# Altium PCB PCB3.PcbDoc
Units mil, origin at the board's own origin, x right, y up, seen from the top; angles counter-clockwise.
Board outline 6000 x 4000 mil, 2 copper layers (Top Layer, Bottom Layer); 67 components, 69 nets, 288 pads, 0 vias.
Unrouted connection lines stored in the file: 159.
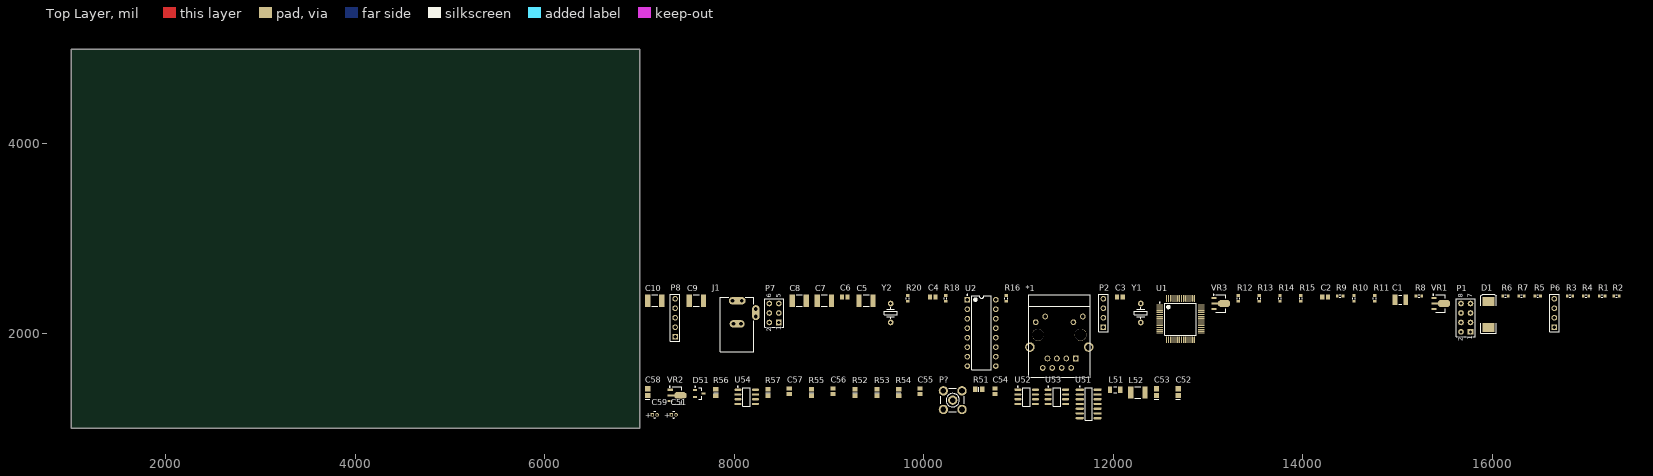
[diagram p0: Top Layer view]
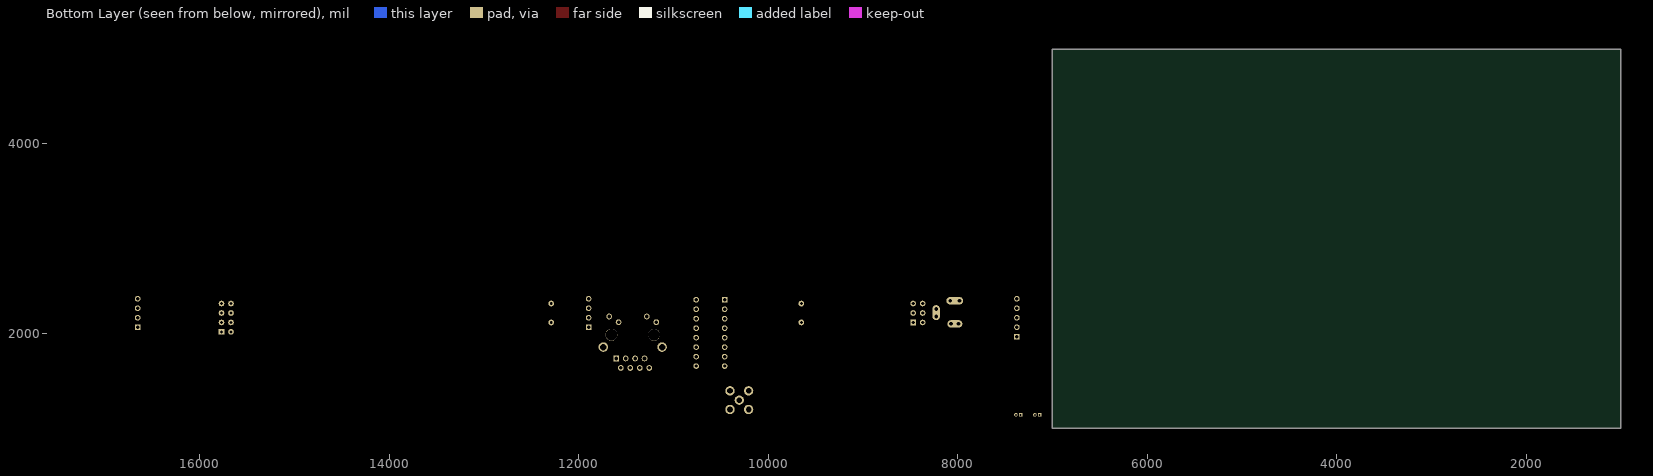
[diagram p1: Bottom Layer view, seen from below]

## Layer stack, top to bottom
Top Layer: signal copper 1.4
Dielectric: dielectric 12.6, FR-4, Dk 4.8
Bottom Layer: signal copper 1.4

## Board outline
1000,1000 7000,1000 7000,5000 1000,5000

## Design rules (kind name [scope] priority, off if disabled: settings)
Clearance [All] p1: gap=10
PolygonConnect [All] p1: connectstyle=Relief reliefconductorwidth=10 reliefentries=4 polygonreliefangle="90 Angle"
RoomDefinition Sheet1 [InComponentClass('Sheet1')] p1: confinementstyle=ConfineIn formatcopy=TRUE lockcomponents=FALSE outline 7045,1525 17390,1525 17390,2525 7045,2525
RoomDefinition Amp [InComponentClass('Amp')] p2: confinementstyle=ConfineIn formatcopy=TRUE lockcomponents=FALSE outline 7045,1060 12795,1060 12795,1525 7045,1525
RoutingVias [All] p1: holewidth=28 width=50 viastyle="Through Hole" minholewidth=28 minwidth=50 maxholewidth=28 maxwidth=50
SilkscreenOverComponentPads [All] p1: minsilkscreentomaskgap=10
SolderMaskExpansion [All] p1: expansion=4
Width [All] p1: maxlimit=10 minlimit=10 preferedwidth=10
27 further rules are at their usual default settings.

## Classes and differential pairs
component class Sheet1: *1 C1 C2 C3 C4 C5 C6 C7 C8 C9 C10 D1 J1 P1 P2 P6 P7 P8 R1 R2 R3 R4 R5 R6 R7 R8 R9 R10 R11 R12 R13 R14 R15 R16 R18 R20 U1 U2 VR1 VR3 Y1 Y2
component class Amp: C51 C52 C53 C54 C55 C56 C57 C58 C59 D51 L51 L52 P? R51 R52 R53 R54 R55 R56 R57 U51 U52 U53 U54 VR2

## Components (designator, comment, footprint, x,y, rotation, side; value= is the part's Value field where it differs from the comment)
*1 "Component_1" EthernetCON 11430,1985 r90 top
C1 "Cap" CAPC3225N 15030,2355 r0 top
C2 "Cap" CAPC2012L 14235,2385 r0 top
C3 "Cap" CAPC2012L 12070,2385 r0 top
C4 "Cap" CAPC2012L 10095,2385 r0 top
C5 "Cap" CAPC4532L 9390,2345 r0 top
C6 "Cap" CAPC2012L 9165,2385 r0 top
C7 "Cap" CAPC4532L 8950,2345 r0 top
C8 "Cap" CAPC4532L 8685,2345 r0 top
C9 "Cap" CAPC4532L 7600,2345 r0 top
C10 "Cap" CAPC4532L 7160,2345 r0 top
C51 "Cap Pol1" CAPPR1.27-1.7x2.8 7360,1140 r0 top
C52 "Cap" CAPC2512L 12685,1380 r90 top
C53 "Cap" CAPC2512L 12455,1380 r90 top
C54 "Cap" CAPC2012L 10750,1390 r90 top
C55 "Cap" CAPC2012L 9960,1390 r90 top
C56 "Cap" CAPC2012L 9040,1390 r90 top
C57 "Cap" CAPC2012L 8580,1390 r90 top
C58 "Cap" CAPC2512L 7085,1380 r90 top
C59 "Cap Pol1" CAPPR1.27-1.7x2.8 7160,1140 r0 top
D1 "Diode" DSO-C2/X3.3 15960,2200 r90 top
D51 "Diode BAT17" SOT95P240-3N 7630,1365 r0 top
J1 "PWR2.5" KLD-0202 8030,1805 r90 top
L51 "Inductor" INDC3216AL 12020,1405 r0 top
L52 "Inductor" INDC4532L 12260,1375 r0 top
P1 "Header 4X2" HDR2X4 15770,2015 r90 top
P2 "Header 4" HDR1X4 11895,2065 r90 top
P6 "Header 4" HDR1X4 16655,2065 r90 top
P7 "Header 3X2" HDR2X3 8470,2115 r90 top
P8 "Header 5" HDR1X5 7375,1965 r90 top
P? "SMB" SMB_V-RJ45 10305,1295 r0 top
R1 "Res3" RESC1608L 17160,2395 r0 top
R2 "Res3" RESC1608L 17310,2395 r0 top
R3 "Res3" RESC1608L 16820,2395 r0 top
R4 "Res3" RESC1608L 16990,2395 r0 top
R5 "Res3" RESC1608L 16480,2395 r0 top
R6 "Res3" RESC1608L 16140,2395 r0 top
R7 "Res3" RESC1608L 16310,2395 r0 top
R8 "Res3" RESC1608L 15225,2395 r0 top
R9 "Res3" RESC1608L 14395,2395 r0 top
R10 "Res3" RESC1608L 14540,2370 r90 top
R11 "Res3" RESC1608L 14760,2370 r90 top
R12 "Res3" RESC1608L 13320,2370 r90 top
R13 "Res3" RESC1608L 13540,2370 r90 top
R14 "Res3" RESC1608L 13760,2370 r90 top
R15 "Res3" RESC1608L 13980,2370 r90 top
R16 "Res3" RESC1608L 10870,2370 r90 top
R18 "Res3" RESC1608L 10230,2370 r90 top
R20 "Res3" RESC1608L 9830,2370 r90 top
R51 "Res2" RESC2012N 10580,1410 r0 top
R52 "Res2" RESC2012N 9275,1375 r90 top
R53 "Res2" RESC2012N 9505,1375 r90 top
R54 "Res2" RESC2012N 9735,1375 r90 top
R55 "Res2" RESC2012N 8815,1375 r90 top
R56 "Res2" RESC2012N 7805,1375 r90 top
R57 "Res2" RESC2012N 8355,1375 r90 top
U1 "PIC18F67J60-I/PT" TQFP-PT64_N 12710,2150 r0 top
U2 "SN754410NE" NE016 10610,2005 r0 top
U51 "SN74S197D" D014_N 11740,1255 r0 top
U52 "SA5205A" SOIC127P600-8L 11085,1330 r0 top
U53 "AD8561" SOIC127P600-8L 11405,1330 r0 top
U54 "AD8400" SOIC127P600-8L 8130,1330 r0 top
VR1 "Volt Reg" SOT89N 15455,2315 r0 top
VR2 "Volt Reg" SOT89N 7395,1345 r0 top
VR3 "Volt Reg" SOT89N 13135,2315 r0 top
Y1 "XTAL" Quartz 12290,2115 r90 top
Y2 "Z" Quartz 9650,2115 r90 top

## Footprints (in the part's own frame and the unit in brackets; to place one, negate y for a bottom-side part, rotate by r counter-clockwise, add the part's x,y. Pads: shape width x height; smd on the part's side, far side on the other; paste and mask are expansions set on the pad)
CAPC2012L [mm] "Chip Capacitor, Body 2.0x1.3mm, IPC High Density"
  rect 1.1x1.4 smd: 1(-0.75,0) 2(0.75,0)
  body extent -1.1,-0.72 1.1,0.72, height 1.4
CAPC2512L [mm] "Chip Capacitor, Body 2.54x1.27mm, IPC High Density"
  rect 1.4x1.4 smd: 1(-0.9,0) 2(0.9,0)
  silkscreen extent -1.9,-0.6 -1.9,0.6, body extent -1.45,-0.82 1.45,0.82, height 1.3
CAPC3225N [mm] "Chip Capacitor, Body 3.2x2.5mm, IPC Medium Density"
  rect 1.3x2.7 smd: 1(-1.45,0) 2(1.45,0)
  silkscreen extent -0.4,-1.25 0.4,1.25, body extent -1.7,-1.35 1.7,1.35, height 1.5
CAPC4532L [mm] "Chip Capacitor, Body 4.5x3.2mm, IPC High Density"
  rect 1.4x3.3 smd: 1(-1.9,0) 2(1.9,0)
  silkscreen extent -0.8,-1.55 0.8,1.55, body extent -2.4,-1.7 2.4,1.7, height 1.4
CAPPR1.27-1.7x2.8 [mm] "Capacitor, Radial, Tantalum; Body 1.7 x 2.8 mm (Dia.xH max); Pin Spacing 1.27 mm (typ)"
  rect 0.95x0.95 hole 0.55: 1(-0.635,0)
  round 0.95 hole 0.55: 2(0.635,0)
  silkscreen extent -0.29,-0.85 0.29,0.85
D014_N [mm] "SOIC, 14-Leads, Body 8.7x3.9mm, Pitch 1.27mm, IPC Medium Density"
  oval 2.2x0.6 smd: 1(-2.4,3.81) 2(-2.4,2.54) 3(-2.4,1.27) 4(-2.4,0) 5(-2.4,-1.27) 6(-2.4,-2.54) 7(-2.4,-3.81) 8(2.4,-3.81) 9(2.4,-2.54) 10(2.4,-1.27) 11(2.4,0) 12(2.4,1.27) 13(2.4,2.54) 14(2.4,3.81)
  silkscreen extent -2.52,-4.4 0.9,4.78, body extent -2,-4.38 2,4.38, height 1.75
DSO-C2/X3.3 [mm] "DO-214-AB/SMC; 2 C-Bend Leads; Body 7.9 x 5.9 mm, inc. leads (LxW)"
  rect 2.4x3.3 smd: 1(-3.475,0) 2(3.475,0)
  silkscreen extent -5.07,-2.05 5.43,2.05
EthernetCON [mil] "Ethernet connector w/two LEDs"
  rect 60x60 hole 38: 1(-250,-175)
  round 60 hole 38: 2(-350,-125) 3(-250,-75) 4(-350,-25) 5(-250,25) 6(-350,75) 7(-250,125) 8(-350,175) 9(193,-249) 10(133,-149) 11(193,149) 12(133,249)
  round 100 hole 70: 13(-130,-310) 14(-130,310)
  round 125 hole 125 unplated: 15(0,-225) 16(0,225)
  silkscreen extent -450,-325 425,325, body extent -450,-325 425,325, height 550
HDR1X4 [mm] "Connector; Header; 4 Position"
  rect 1.5x1.5 hole 0.9: 1(0,0)
  round 1.5 hole 0.9: 2(2.54,0) 3(5.08,0) 4(7.62,0)
  silkscreen extent -1.27,-1.27 8.89,1.27
HDR1X5 [mm] "Connector; Header; 5 Position"
  rect 1.5x1.5 hole 0.9: 1(0,0)
  round 1.5 hole 0.9: 2(2.54,0) 3(5.08,0) 4(7.62,0) 5(10.16,0)
  silkscreen extent -1.27,-1.27 11.43,1.27
HDR2X3 [mm] "Connector; Header; 3x2 Position"
  rect 1.5x1.5 hole 0.9: 1(0,0)
  round 1.5 hole 0.9: 2(0,2.54) 3(2.54,0) 4(2.54,2.54) 5(5.08,0) 6(5.08,2.54)
  silkscreen extent -1.27,-1.27 6.35,3.81
HDR2X4 [mm] "Connector; Header; 4x2 Position"
  rect 1.5x1.5 hole 0.9: 1(0,0)
  round 1.5 hole 0.9: 2(0,2.54) 3(2.54,0) 4(2.54,2.54) 5(5.08,0) 6(5.08,2.54) 7(7.62,0) 8(7.62,2.54)
  silkscreen extent -1.27,-1.27 8.89,3.81
INDC3216AL [mm] "Chip Inductor, Body 3.2x1.6mm, IPC High Density"
  rect 1.1x1.8 smd: 1(-1.35,0) 2(1.35,0)
  silkscreen extent -0.4,-0.8 0.4,0.8, body extent -1.7,-0.9 1.7,0.9, height 0.55
INDC4532L [mm] "Chip Inductor, Body 4.5x3.2mm, IPC High Density"
  rect 1.4x3.3 smd: 1(-1.9,0) 2(1.9,0)
  silkscreen extent -0.8,-1.55 0.8,1.55, body extent -2.4,-1.7 2.4,1.7, height 0.55
KLD-0202 [mm] "DC Power Jack, 2.5mm, KLD Series, PCB Mount"
  oval 2x4.5 all layers, no hole: 1(13.7,0)
  round 1.5 hole 1: 1A(13.7,-1.25) 1B(13.7,1.25) 2A(7.5,-1) 2B(7.5,1) 3A(9.5,-5) 3B(11.5,-5)
  oval 2x4 all layers, no hole: 2(7.5,0)
  oval 4x2 all layers, no hole: 3(10.5,-5)
  silkscreen extent 0,-4.5 14.6,4.5
NE016 [mm] "DIP, 16-Leads, Row Spacing 7.62mm, Pitch 2.54mm, Body 19.4x6.35mm"
  rect 1.5x1.5 hole 0.9: 1(-3.81,8.89)
  round 1.5 hole 0.9: 2(-3.81,6.35) 3(-3.81,3.81) 4(-3.81,1.27) 5(-3.81,-1.27) 6(-3.81,-3.81) 7(-3.81,-6.35) 8(-3.81,-8.89) 9(3.81,-8.89) 10(3.81,-6.35) 11(3.81,-3.81) 12(3.81,-1.27) 13(3.81,1.27) 14(3.81,3.81) 15(3.81,6.35) 16(3.81,8.89)
  silkscreen extent -3.93,-9.9 2.65,10.31, body extent -3.3,-9.9 3.3,9.9, height 5.08
Quartz [mil]
  round 60 hole 30: 1(0,0) 2(200,0)
  silkscreen extent 40,-70 160,70, body extent -100,-100 300,100, height 90
RESC1608L [mm] "Chip Resistor, Body 1.6x0.8mm, IPC High Density"
  rect 0.7x0.9 smd: 1(-0.75,0) 2(0.75,0)
  silkscreen extent -0.2,-0.35 0.2,0.35, body extent -0.85,-0.48 0.85,0.48, height 0.9
RESC2012N [mm] "Chip Resistor, Body 2.0x1.2mm, IPC Medium Density"
  rect 1.2x1.4 smd: 1(-0.9,0) 2(0.9,0)
  silkscreen extent 0,-0.6 0,0.6, body extent -1.07,-0.7 1.07,0.7, height 0.7
SMB_V-RJ45 [mm] "Connector; SMB Straight"
  round 2.5 hole 1.5: 1(0,0) 2(-2.5,-2.5) 2(-2.5,2.5) 2(2.5,-2.5) 2(2.5,2.5)
  silkscreen extent -3.15,-3.15 3.15,3.15
SOIC127P600-8L [mm] "SOIC, 8-Leads, Body 4.9x3.9mm, Pitch 1.27mm, IPC High Density"
  oval 1.9x0.6 smd: 1(-2.35,1.905) 2(-2.35,0.635) 3(-2.35,-0.635) 4(-2.35,-1.905) 5(2.35,-1.905) 6(2.35,-0.635) 7(2.35,0.635) 8(2.35,1.905)
  silkscreen extent -2.47,-2.5 1,2.88, body extent -2,-2.5 2,2.5, height 1.75
SOT89N [mm] "SOT89, 3-Leads, Body 4.5x2.4 mm, Pitch 1.5mm, Lead Span 4.1mm, IPC Medium Density"
  rect 1.4x0.6 smd: 1(-1.8,1.5) 3(-1.8,-1.5)
  rect 1.8x0.6 smd: 2(-1.6,0)
  oct 3.2x1.9 smd: 2(0.9,0)
  silkscreen extent -2.07,-2.3 1.3,2.47, body extent -1.3,-2.3 1.3,2.3, height 1.6
SOT95P240-3N [mm] "SOT23, 3-Leads, Body 2.9x1.3mm, Pitch 0.95mm, Lead Span 2.4mm, IPC Medium Density"
  rect 1.15x0.6 smd: 1(-1.125,0.95) 2(-1.125,-0.95) 3(1.125,0)
  silkscreen extent -1.25,-1.5 0.7,1.92, body extent -0.7,-1.5 0.7,1.5, height 1.14
TQFP-PT64_N [mm] "Thin QFP, 64-Leads, Body 10x10mm, Pitch 0.5mm, IPC Medium Density"
  oval 1.8x0.3 smd: 1(-5.55,3.75) 2(-5.55,3.25) 3(-5.55,2.75) 4(-5.55,2.25) 5(-5.55,1.75) 6(-5.55,1.25) 7(-5.55,0.75) 8(-5.55,0.25) 9(-5.55,-0.25) 10(-5.55,-0.75) 11(-5.55,-1.25) 12(-5.55,-1.75) 13(-5.55,-2.25) 14(-5.55,-2.75) 15(-5.55,-3.25) 16(-5.55,-3.75) 33(5.55,-3.75) 34(5.55,-3.25) 35(5.55,-2.75) 36(5.55,-2.25) 37(5.55,-1.75) 38(5.55,-1.25) 39(5.55,-0.75) 40(5.55,-0.25) 41(5.55,0.25) 42(5.55,0.75) 43(5.55,1.25) 44(5.55,1.75) 45(5.55,2.25) 46(5.55,2.75) 47(5.55,3.25) 48(5.55,3.75)
  oval 0.3x1.8 smd: 17(-3.75,-5.55) 18(-3.25,-5.55) 19(-2.75,-5.55) 20(-2.25,-5.55) 21(-1.75,-5.55) 22(-1.25,-5.55) 23(-0.75,-5.55) 24(-0.25,-5.55) 25(0.25,-5.55) 26(0.75,-5.55) 27(1.25,-5.55) 28(1.75,-5.55) 29(2.25,-5.55) 30(2.75,-5.55) 31(3.25,-5.55) 32(3.75,-5.55) 49(3.75,5.55) 50(3.25,5.55) 51(2.75,5.55) 52(2.25,5.55) 53(1.75,5.55) 54(1.25,5.55) 55(0.75,5.55) 56(0.25,5.55) 57(-0.25,5.55) 58(-0.75,5.55) 59(-1.25,5.55) 60(-1.75,5.55) 61(-2.25,5.55) 62(-2.75,5.55) 63(-3.25,5.55) 64(-3.75,5.55)
  silkscreen extent -5.67,-4.25 4.25,4.57, body extent -5,-5 5,5, height 1.2

## Part data
C1 C2 C3 C4 C5 C6 C7 C8 C9 C10 C52 C53 C54 C55 C56 C57 C58: "Capacitor"
C51 C59: "Polarized Capacitor (Radial)"
D1: "Default Diode"
D51: "Silicon RF Schottky Diode for Mixer Applications in the VHF/UHF Range"
J1: "Low Voltage Power Supply Connector"
P1: "Header, 4-Pin, Dual row"
P2 P6: "Header, 4-Pin"
P7: "Header, 3-Pin, Dual row"
P8: "Header, 5-Pin"
P?: "SMB Straight Connector"
R1 R2 R3 R4 R5 R6 R7 R8 R9 R10 R11 R12 R13 R14 R15 R16 R18 R20 R51 R52 R53 R54 R55 R56 R57: "Resistor"
U1: "High Performance, 1-Mbit Flash Microcontroller with Ethernet, 128K Flash, 64-Pin TQFP, Industrial Temperature Range"
U2: "Quadruple Half-H Driver"
U51: "100-MHz Presettable Decade or Binary Counter / Latch"
U52: "Wide-band high-frequency amplifier"
U53: "Ultrafast 7 ns  Single Supply Comparator"
U54: "Digital Potentiometers"
VR1 VR2 VR3: "Voltage Regulator"
Y1: "Crystal Oscillator"
Y2: library part XTAL, "32768 kHz"

## Nets (pads, with @x,y where several pads share a name; then routed paths per layer and width w, separated by ;. In a path a pad name is that pad's centre, name@x,y a point inside that pad or via, vN(x,y) a via of type N, cw(c..) or ccw(c..) an arc to the next point about the centre after c; other vN are vias at no path point)
+12: J1.1 J1.1A J1.1B U2.8 VR1.1 VR2.1 VR3.1
COUNTERRESET: U1.62 U51.13
D0: U1.2 U51.5 U51.6
D1: U1.1 U51.9
D2: U1.64 U51.2
D3: U1.28 U1.63 U51.12
DISPOFF: P7.2 U1.60
ENABLECOUNT: U1.61 U53.5
GND: C51.2 C52.2 C53.1 C56.1 C57.2 C58.1 C59.2 D51.1 P?.2 R52.1 R55.1 U51.3 U51.4 U51.7 U51.10 U51.11 U52.3 U52.4 U52.5 U52.6 U53.4 U53.6 U54.1 U54.2 VR2.2
INPUT: C55.1 P?.1 R55.2
Net*1_1: *1.1 U1.51
Net*1_2: *1.2 U1.50
Net*1_3: *1.3 U1.47
Net*1_6: *1.6 U1.46
Net*1_9: *1.9 R20.1
Net*1_12: *1.12 R16.1
NetC1_2: C1.2 D1.1 P6.3 P8.1 R5.1 R8.2
NetC2_2: C2.2 U1.39 Y1.2
NetC3_1: C3.1 U1.40 Y1.1
NetC4_1: C4.1 U1.30 Y2.1
NetC5_1: C5.1 U1.10
NetC6_2: C6.2 U1.29 Y2.2
NetC51_1: C51.1 C52.1 L51.2 L52.1 R56.1 U53.1 U54.6
NetC53_2: C53.2 L51.1 U52.1 U52.8
NetC54_1: C54.1 U52.7
NetC54_2: C54.2 R52.2 R53.2 U53.3
NetC55_2: C55.2 U52.2
NetC56_2: C56.2 R54.2 R57.2 U53.2
NetC57_1: C57.1 D51.3 R53.1 R56.2 R57.1 U54.8
NetC58_2: C58.2 C59.1 L52.2 U51.1 U51.14 VR2.3
NetP1_3: P1.3 R9.1 R15.1
NetP1_4: P1.4 R1.1 R14.1
NetP1_5: P1.5 R10.1 R12.1
NetP1_6: P1.6 R2.1 R13.1
NetP1_7: P1.7 P1.8 R11.1
NetP2_1: P2.1 U2.3
NetP2_2: P2.2 U2.6
NetP2_3: P2.3 U2.11
NetP2_4: P2.4 U2.14
NetP6_1: P6.1 R6.1
NetP6_2: P6.2 R3.2
NetP7_4: P7.4 U1.59
NetP8_4: P8.4 U1.37
NetP8_5: P8.5 U1.42
NetR3_1: R3.1 R4.1 U1.5
NetR6_2: R6.2 R7.1 U1.6
NetR8_1: R8.1 U1.7
NetR12_2: R12.2 U1.21
NetR13_2: R13.2 U1.22
NetR14_2: R14.2 U1.3
NetR15_2: R15.2 U1.4
NetR16_2: R16.2 U1.24
NetR18_2: R18.2 U1.53
NetR20_2: R20.2 U1.23
NetR51_1: R51.1 U51.8
NetR51_2: R51.2 U53.8
NetR54_1: R54.1 U54.7
NetU1_12: U1.12 U2.9
NetU1_13: U1.13 U2.1
NetU1_14: U1.14 U2.15
NetU1_15: U1.15 U2.10
NetU1_16: U1.16 U2.7
NetU1_17: U1.17 U2.2
NetU1_36: U1.36
NetU2_16: U2.16 VR3.3
SPI_CLK: P7.3 U1.34 U54.5
SPI_CS: U1.58 U54.3
SPI_SD: P7.5 U1.35 U54.4
VCC: C7.2 C8.2 C9.2 C10.2 D1.2 P7.1 P8.2 R1.2 R2.2 R4.2 R5.2 R7.2 R9.2 R10.2 R11.2 U1.18 U1.19 U1.26 U1.38 U1.48 U1.49 U1.54 U1.57 VR1.3
pads on no net: *1.4 *1.5 *1.7 *1.8 *1.10 *1.11 *1.13 *1.14 *1.15 *1.16 C1.1 C2.1 C3.2 C4.2 C5.2 C6.1 C7.1 C8.1 C9.1 C10.1 D51.2 J1.2 J1.2A J1.2B J1.3 J1.3A J1.3B P1.1 P1.2 P6.4 P7.6 P8.3 R18.1 U1.8 U1.9 U1.11 U1.20 U1.25 U1.27 U1.31 U1.32 U1.33 U1.41 U1.43 U1.44 U1.45 U1.52 U1.55 U1.56 U2.4 U2.5 U2.12 U2.13 U53.7 VR1.2 VR3.2

## Text inside footprints (layer, text, board x,y; h text height)
C51: Top Overlay "+" at 7262.17,1110.47 h59.06
C59: Top Overlay "+" at 7062.17,1110.47 h59.06
J1: Mechanical 1 "Mech 2 - Clearance, move to internal plane if present" at 7830.56,1816.26 h11.81 r90; Mechanical 1 "Mech 1 - Slot cut-out" at 7810.87,1816.26 h11.81 r90; Mechanical 1 "Assign keep-out area to slot" at 7771.5,1816.26 h11.81 r90; Mechanical 1 "Alert PCB fab to slot details" at 7791.19,1816.26 h11.81 r90
P1: Top Overlay "2" at 15690,1915 h50 r90; Top Overlay "1" at 15790,1935 h50 r90; Top Overlay "7" at 15790,2375 h50 r90; Top Overlay "8" at 15690,2375 h50 r90
P7: Top Overlay "6" at 8390,2375 h50 r90; Top Overlay "5" at 8490,2375 h50 r90; Top Overlay "2" at 8390,2015 h50 r90; Top Overlay "1" at 8490,2035 h50 r90